# Altium PCB PMPi-PCB.PcbDoc
Units mil, origin at the board's own origin, x right, y up, seen from the top; angles counter-clockwise.
Board outline 1890.01 x 2124.02 mil, 2 copper layers (Top Layer, Bottom Layer), stack 61.811 mil thick; 12 components, 52 nets, 198 pads, 4 vias.
Unrouted connection lines stored in the file: 24.
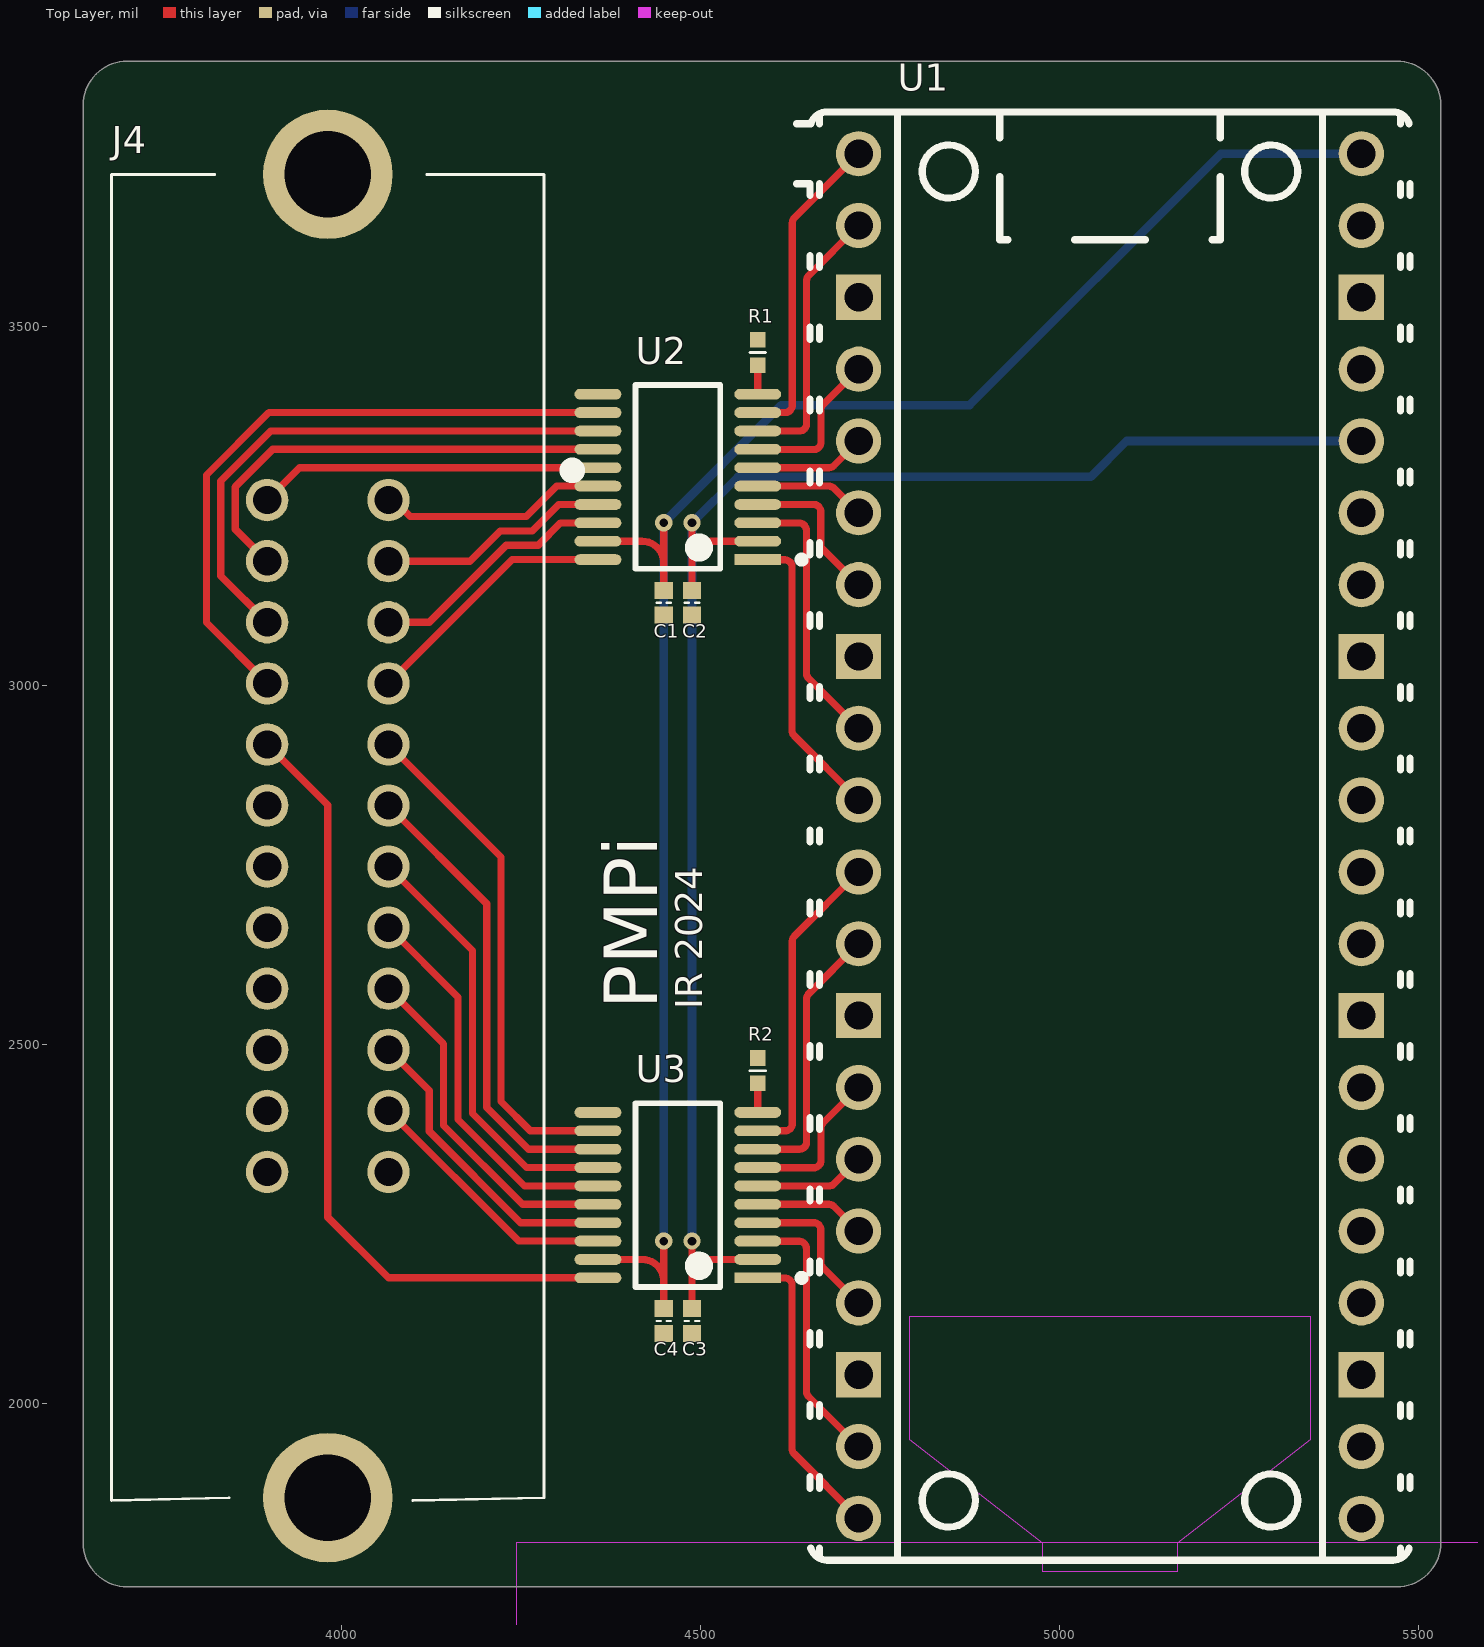
[diagram p0: Top Layer view]
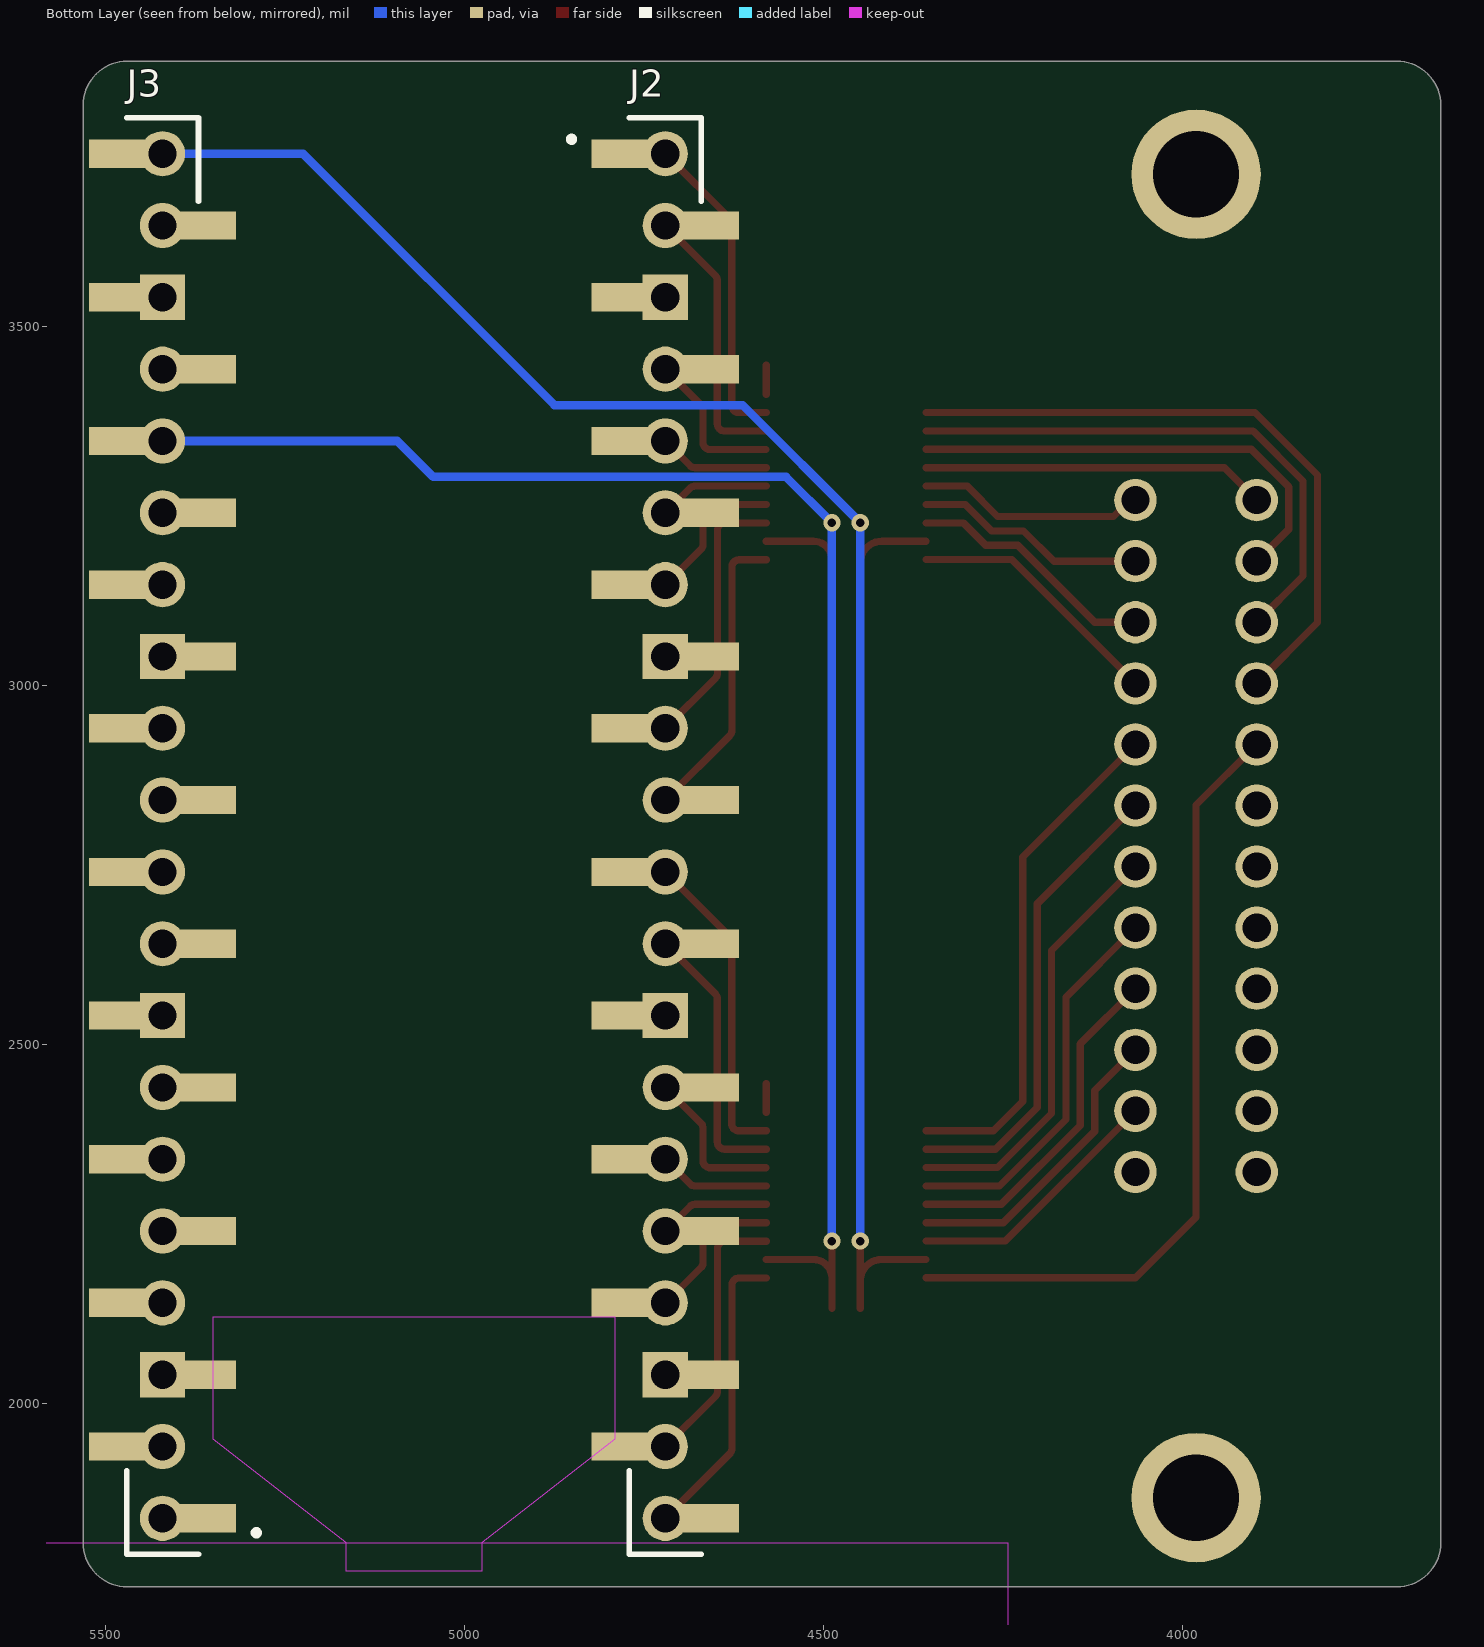
[diagram p1: Bottom Layer view, seen from below]

## Layer stack, top to bottom
Top Solder: solder mask 0.5, Solder Resist, Dk 3.8
Top Layer: signal copper 1.378
Dielectric: core 59.0551, FR-4, Dk 4.5
Bottom Layer: signal copper 1.378
Bottom Solder: solder mask 0.5, Solder Resist, Dk 3.8

## Board outline
3640.43,1805.75 3640.43,3807.72 cw(c3701.45,3807.72) 3701.45,3868.74 5469.41,3868.74 cw(c5469.41,3807.72) 5530.43,3807.72 5530.43,1805.75 cw(c5469.41,1805.75) 5469.41,1744.72 3701.45,1744.72 cw(c3701.45,1805.75)

## Design rules (kind name [scope] priority, off if disabled: settings)
BoardOutlineClearance [All] p1: gap=7.87 ignorepadtopadclearanceinfootprint=FALSE
Clearance [All] p1: gap=5 ignorepadtopadclearanceinfootprint=FALSE except(9.84: Arc-Hole Track-Hole SMDPad-Hole THPad-Hole Via-Hole Fill-Hole Poly-Hole Region-Hole Text-Hole)
ComponentClearance [All] p1: gap=5 collisioncheckmode=3 verticalgap=5 showdistances=TRUE
DiffPairsRouting [All] p1: maxlimit=10 minlimit=5 mostfreqgap=5 toplayer_minwidth=5 toplayer_maxwidth=1000 toplayer_prefwidth=5 bottomlayer_minwidth=5 bottomlayer_maxwidth=1000 bottomlayer_prefwidth=5 maxuncoupledlength=500
Height [All] p1: minheight=0 maxheight=71497.94 prefheight=500
HoleSize [All] p1: absolutevalues=TRUE maxlimit=248.03 minlimit=11.81 maxpercent=80.000 minpercent=20.000
HoleToHoleClearance [All] p1: gap=9.84 allowstackedmicrovias=FALSE
MinimumAnnularRing [All] p1: minimumring=5
MinimumSolderMaskSliver [All] p1: minsoldermaskwidth=0
PlaneClearance [All] p1: clearance=5
PlaneConnect PlaneConnectPowerPads [InPadClass('PowerPads')] p1: planeconnectstyle=Direct reliefexpansion=20 reliefentries=4 reliefconductorwidth=10 reliefairgap=10
PlaneConnect [All] p2: pad.planeconnectstyle=Relief pad.reliefexpansion=11.81 pad.reliefentries=4 pad.reliefconductorwidth=5 pad.reliefairgap=5 via.planeconnectstyle=Direct via.reliefexpansion=11.81 via.reliefentries=4 via.reliefconductorwidth=5 via.reliefairgap=5
PolygonConnect PolygonConnectPowerPads [All vs (InPadClass('PowerPads'))] p1: connectstyle=Direct reliefconductorwidth=10 reliefentries=4 polygonreliefangle="90 Angle" airgapwidth=10
PolygonConnect [All] p2: thpad.connectstyle=Relief thpad.reliefconductorwidth=5 thpad.reliefentries=4 thpad.polygonreliefangle="90 Angle" thpad.airgapwidth=5 smdpad.connectstyle=Relief smdpad.reliefconductorwidth=5 smdpad.reliefentries=4 smdpad.polygonreliefangle="90 Angle" smdpad.airgapwidth=5 via.connectstyle=Direct via.reliefconductorwidth=5 via.reliefentries=4 via.polygonreliefangle="90 Angle" via.airgapwidth=5
RoutingVias [All] p1: holewidth=16 width=32 viastyle="Through Hole" minholewidth=11.81 minwidth=23.62 maxholewidth=23.62 maxwidth=259.84
SilkToSilkClearance [All] p1: silktosilkclearance=0
SilkToSolderMaskClearance [IsPad] p1: minsilkscreentomaskgap=5 clearancetoexposedcopper=TRUE
SolderMaskExpansion [All] p1: expansion=2.95 istentingtop=FALSE
Width [All] p1: maxlimit=1000 minlimit=5 preferedwidth=16 minimp=50.000000 maximp=50.000000 favimp=50.000000
20 further rules are at their usual default settings.

## Classes and differential pairs
component class U_GPIB: C1 C2 C3 C4 J4 R1 R2 U2 U3
component class U_Pico: J2 J3 U1

## Components (designator, comment, footprint, x,y, rotation, side; value= is the part's Value field where it differs from the comment)
C1 "CAP-NP-2" "CAP 0402_1005" 4448.65,3114.8 r270 top value=100nF
C2 "CAP-NP-2" "CAP 0402_1005" 4488.02,3114.8 r270 top value=100nF
C3 "CAP-NP-2" "CAP 0402_1005" 4488.02,2114.8 r270 top value=100nF
C4 "CAP-NP-2" "CAP 0402_1005" 4448.65,2114.8 r270 top value=100nF
J2 "CMP-708-000000-5" SAMTEC_SSM-120-L-SV-BE 4720,2790 r90 bottom
J3 "CMP-708-000000-5" SAMTEC_SSM-120-L-SV-BE 5420,2790 r270 bottom
J4 "111-024-113L001" 111024113L001 4065.43,3257.72 r270 top locked
R1 "10K-0402-0.1/1" "RES 0402_1005" 4579.57,3463.23 r270 top value=10k
R2 "10K-0402-0.1/1" "RES 0402_1005" 4579.57,2463.23 r270 top value=10k
U1 "Raspberry Pi Pico WH" RASPBERRYPIPICOWH-Footprint-1 4659.1,1787.19 r0 top
U2 "TXS0108EQPWRQ1" FP-PW0020A-IPC_B 4468.33,3290 r180 top
U3 "TXS0108EQPWRQ1" FP-PW0020A-IPC_B 4468.33,2290 r180 top

## Footprints (in the part's own frame and the unit in brackets; to place one, negate y for a bottom-side part, rotate by r counter-clockwise, add the part's x,y. Pads: shape width x height; smd on the part's side, far side on the other; paste and mask are expansions set on the pad)
111024113L001 [mm]
  round 1.5 hole 1: 1(0,0) 2(2.16,0) 3(4.32,0) 4(6.48,0) 5(8.64,0) 6(10.8,0) 7(12.96,0) 8(15.12,0) 9(17.28,0) 10(19.44,0) 11(21.6,0) 12(23.76,0) 13(0,-4.29) 14(2.16,-4.29) 15(4.32,-4.29) 16(6.48,-4.29) 17(8.64,-4.29) 18(10.8,-4.29) 19(12.96,-4.29) 20(15.12,-4.29) 21(17.28,-4.29) 22(19.44,-4.29) 23(21.6,-4.29) 24(23.76,-4.29)
  round 4.575 hole 3.05: MH1(-11.52,-2.145) MH2(35.28,-2.145)
  silkscreen extent -11.52,-9.79 35.38,6.55, body extent -15.44,-9.79 39.21,5.51, height 13.88
"CAP 0402_1005" [mm] "Chip Capacitor, 2-Leads, Body 1.02x0.51mm, IPC Medium Density"
  rect 0.6x0.64 smd: 1(-0.44,0) 2(0.44,0)
  silkscreen extent 0,-0.26 0,0.26, body extent -0.5,-0.26 0.5,0.26, height 0.52
FP-PW0020A-IPC_B [mm]
  rect 1.655x0.381 smd paste+0 mask+0: 1(-2.825,2.925)
  rrect100% 1.655x0.381 smd paste+0 mask+0: 2(-2.825,2.275) 3(-2.825,1.625) 4(-2.825,0.975) 5(-2.825,0.325) 6(-2.825,-0.325) 7(-2.825,-0.975) 8(-2.825,-1.625) 9(-2.825,-2.275) 10(-2.825,-2.925) 11(2.825,-2.925) 12(2.825,-2.275) 13(2.825,-1.625) 14(2.825,-0.975) 15(2.825,-0.325) 16(2.825,0.325) 17(2.825,0.975) 18(2.825,1.625) 19(2.825,2.275) 20(2.825,2.925)
  silkscreen extent -4.5,-3.25 1.5,3.25, body extent -3.9,-3.5 3.9,3.5, height 0.25
RASPBERRYPIPICOWH-Footprint-1 [mm]
  round 1.6 hole 1: 1(1.547,49.601) 2(1.547,47.061) 4(1.547,41.981) 5(1.547,39.441) 6(1.547,36.901) 7(1.547,34.361) 9(1.547,29.281) 10(1.547,26.741) 11(1.547,24.201) 12(1.547,21.661) 14(1.547,16.581) 15(1.547,14.041) 16(1.547,11.501) 17(1.547,8.961) 19(1.547,3.881) 20(1.547,1.341) 21(19.327,1.341) 22(19.327,3.881) 24(19.327,8.961) 25(19.327,11.501) 26(19.327,14.041) 27(19.327,16.581) 29(19.327,21.661) 30(19.327,24.201) 31(19.327,26.741) 32(19.327,29.281) 34(19.327,34.361) 35(19.327,36.901) 36(19.327,39.441) 37(19.327,41.981) 39(19.327,47.061) 40(19.327,49.601)
  rect 1.6x1.6 hole 1: 3(1.547,44.521) 8(1.547,31.821) 13(1.547,19.121) 18(1.547,6.421) 23(19.327,6.421) 28(19.327,19.121) 33(19.327,31.821) 38(19.327,44.521)
  Keep-Out Layer region: -10.563,-9.529 31.437,-9.529 31.437,0.471 -10.563,0.471
  Keep-Out Layer region: 3.337,4.131 8.037,0.481 8.037,-0.529 12.837,-0.529 12.837,0.481 17.537,4.131 17.537,8.471 3.337,8.471
  silkscreen extent -0.65,-0.14 21.05,51.08, body extent 0,0 21,52.35, height 3.69
"RES 0402_1005" [mm] "Chip Resistor, 2-Leads, Body 1.0x0.5mm, IPC Medium Density"
  rect 0.55x0.55 smd: 1(-0.45,0) 2(0.45,0)
  silkscreen extent 0,-0.28 0,0.27, body extent -0.5,-0.25 0.5,0.25, height 0.35
SAMTEC_SSM-120-L-SV-BE [mm]
  round 1.6 hole 1 unplated: 01(24.13,0) 02(21.59,0) 03(19.05,0) 04(16.51,0) 05(13.97,0) 06(11.43,0) 07(8.89,0) 08(6.35,0) 09(3.81,0) 10(1.27,0) 11(-1.27,0) 12(-3.81,0) 13(-6.35,0) 14(-8.89,0) 15(-11.43,0) 16(-13.97,0) 17(-16.51,0) 18(-19.05,0) 19(-21.59,0) 20(-24.13,0)
  rect 1x2 smd: 01(24.13,1.603) 02(21.59,-1.603) 03(19.05,1.603) 04(16.51,-1.603) 05(13.97,1.603) 06(11.43,-1.603) 07(8.89,1.603) 08(6.35,-1.603) 09(3.81,1.603) 10(1.27,-1.603) 11(-1.27,1.603) 12(-3.81,-1.603) 13(-6.35,1.603) 14(-8.89,-1.603) 15(-11.43,1.603) 16(-13.97,-1.603) 17(-16.51,1.603) 18(-19.05,-1.603) 19(-21.59,1.603) 20(-24.13,-1.603)
  silkscreen extent -25.4,-1.27 25.4,3.41, body extent -25.4,-2.29 25.4,2.29, height 7.62

## Part data
C1 C2 C3 C4: library part CMP-00000-4, "Ceramic Capacitor, Multilayer, Ceramic, 10V, 10% +Tol, 10% -Tol, X7R, 15% TC, 0.1uF, Surface Mount, 0402", Capacitance=100nF, Capacitor Type=Ceramic, Case Code (Imperial)=0402, Case Code (Metric)=1005, Dielectric=X7R, Max Operating Temperature=125°C, Min Operating Temperature=-55°C, Package Quantity=1, Package Shape=Rectangular, Package Style=SMTMeter, Rated DC Voltage (URdc)=10V, Tolerance=10%, Case/Package=0402, China RoHS Status=Unaffected, Conflict Mineral="DRC Conflict Undeterminable", Construction=Flat, Contact Plating=Tin, Depth=0.5mm, Dielectric Material=Ceramic, ELV=Compliant, EU SVHC List Version="Jan 23, 2024", Global PFAS Assessment Status="Not Affected", Green=Compliant, Halogen Free=Compliant, Height=0.5mm, JESD-609 Code=e3, Lead Free=Compliant, Length=1mm, Mount="Surface Mount", Mounting Technology="Surface Mount", Multilayer=Yes, NAS411=Affected, Packaging="Tape and Reel", Persistent Organic Pollutants (POPs)="Not Affected", Pins=2, Radiation Hardening=No, Rare Earth Element Information="Rare Earth Free", Reach SVHC Compliant=Yes, REACH(SVHC) Information=Unaffected, RoHS Compliant=Yes, RoHS Status=Yes, RoHS Version="2011/65/EU, 2015/863", Series=CL, Temperature Characteristics Code=X7R, Terminal Finish=Nickel, Termination=Wraparound, Thickness=0.022inch, Tolerance  (fill in as +-)=10%, Tolerance (fill in as +-)=10%, TSCA=Compliant, Voltage Rating=10V, Width=0.5mm
J2 J3: library part CMP-002-00006-2, "Board Connector, 20 Contact(s), 1 Row(s), Female, Straight, Surface Mount Terminal, Socket", Manufacturer Series=SSM, Package=None, Availability=Unavailable, Body/Shell Style=SOCKET, China RoHS Status=Unaffected, Conflict Mineral="DRC Conflict Free", Connector Type="BOARD CONNECTOR", Contact Finish - Mating="GOLD (10) OVER NICKEL (50)", Contact Finish - Termination="MATTE TIN OVER NICKEL (50)", Contact Gender=Female, Contact Material=Bronze, Design Item ID=SSM-120-L-SV-BE, DIN Conformance=No, ELV=Compliant, EU SVHC List Version="Jan 23, 2024", Filter Feature=No, Global PFAS Assessment Status="Not Affected", Green=Compliant, Halogen Free=Compliant, IEC Conformance=No, JESD-609 Code=e3, Lead Free=Compliant, Mating Information="MULTIPLE MATING PARTS AVAILABLE", MF="{'manufacturer': u'Samtec'}", MIL Conformance=No, Mixed Contacts=No, Mounting Style=STRAIGHT, Mounting Technology=Board, MP=SSM-120-L-SV-BE, NAS411=Affected, Number of Contacts=20, Number of Rows Loaded=1, Option="General Purpose", Persistent Organic Pollutants (POPs)=Compliant, Price=None, Rare Earth Element Information="Rare Earth Free", Reach SVHC Compliant=Yes, REACH(SVHC) Information=Unaffected, RoHS Compliant=Yes, RoHS Status=Yes, RoHS Version="2011/65/EU, 2015/863", Source=SSM-120-L-SV-BE-K.SchLib, Terminal Pitch=2.54mm, Termination=SMD/SMT, TSCA=Compliant
J4: library part CMP-002-00009-2, "Telecom and Datacom Connector", Manufacturer_Name=NorComp, Mouser Part Number=636-111-024-113L001, Conflict Mineral="DRC Conflict Free", Datasheet Link=https://componentsearchengine.com/Datasheets/2/111-024-113L001.pdf, Design Item ID=111-024-113L001, ELV=Unknown, EU SVHC List Version="Jan 15, 2018", Global PFAS Assessment Status="Not Affected", Green=Unknown, Halogen Free=Unknown, Height=12.55mm, Lead Free=Unknown, Manufacturer_Part_Number=111-024-113L001, Mouser Price/Stock=https://www.mouser.co.uk/ProductDetail/NorComp/111-024-113L001?qs=IGgAdOvCTsTzuqCRtmjabw%3D%3D, Persistent Organic Pollutants (POPs)=Compliant, REACH(SVHC) Information=Unaffected, RoHS Status=Yes, RoHS Version=2011/65/EU, Source=SamacSys.SchLib, TSCA=Compliant
R1 R2: library part CMP-009-00033-2, "Fixed Resistor, Metal Glaze/thick Film, 0.1W, 10000ohm, 50V, 1% +/-Tol, 100ppm/Cel, Surface Mount, 0402", Case/Package=0402, Max Operating Temperature=155°C, Min Operating Temperature=-55°C, Package Height=0.35mm, Package Length=1mm, Package Shape=Rectangular, Package Style=SMTMeter, Package Width=0.5mm, Power=100mW, Rated Temperature=70°C, Resistor Type="FIXED RESISTOR", Temperature Coefficient=100ppm/°C, Tolerance=1%, Working Voltage=50V, China RoHS Status=Affected, Conflict Mineral="DRC Conflict Undeterminable", Construction=Rectangular, ELV="Not Compliant", EU SVHC List Version="Jan 23, 2024", Global PFAS Assessment Status="Not Affected", Green="Not Compliant", Halogen Free=Compliant, JESD-609 Code=e3, Lead Free="Not Compliant", Mounting Technology="Surface Mount", NAS411=Affected, Packaging="Tape and Reel", Persistent Organic Pollutants (POPs)=Compliant, Pins=2, Rare Earth Element Information="Rare Earth Free", Reach SVHC Compliant=Yes, REACH(SVHC) Information=Unaffected, Reference Standard=AEC-Q200, RoHS Compliant=Yes, RoHS Status="Yes with Exemption", RoHS Version="2011/65/EU, 2015/863", Technology="METAL GLAZE/THICK FILM", Terminal Finish=Nickel, Termination=Wraparound, TSCA=Compliant
U1: library part CMP-759-000000-2, "RASPBERRY PI BOARD, ARM CORTEX-M0+; Silicon Manufacturer: Raspberry Pi; No. of Bits: 32bit; Silicon Family Name: -;...", ComponentLink1Description=Source, ComponentLink1URL=https://github.com/recursivenomad/ki-lime-pi-pico, Design Item ID=CMP-00016-14, Source=Main.SCHLIB
U2 U3: library part CMP-015-00001-1, "Interface Circuit, PDSO20", Case/Package=TSSOP, Max Operating Temperature=125°C, Max Supply Voltage=3.6V, Min Operating Temperature=-40°C, Min Supply Voltage=1.4V, Nominal Supply Voltage=1.5V, Package Body Material=Plastic, Package Equivalence Code=TSSOP20,.25, Package Shape=Rectangular, Package Style="SMALL OUTLINE, THIN PROFILE, SHRINK PITCHMeter", Temperature Grade=AUTOMOTIVE, Channels=8, China RoHS Status=Unaffected, Conflict Mineral="DRC Conflict Free", ELV=Compliant, EU SVHC List Version="Jan 23, 2024", Global PFAS Assessment Status="Not Affected", Green=Compliant, Halogen Free=Compliant, Height - Seated (Max)=1.2mm, Interface IC Type="INTERFACE CIRCUIT", JESD-30 Code=R-PDSO-G20, JESD-609 Code=e4, Lead Free=Compliant, Length=6.5mm, Moisture Sensitivity Level=1, NAS411=Affected, Persistent Organic Pollutants (POPs)=Compliant, Pins=20, Rare Earth Element Information="Contain Rare Earth Element", Reach SVHC Compliant=Yes, REACH(SVHC) Information=Unaffected, RoHS Compliant=Yes, RoHS Status=Yes, RoHS Version="2011/65/EU, 2015/863", Surface Mount=Yes, Terminal Finish=Nickel, Terminal Form="Gull Wing", Terminal Pitch=0.65mm, Terminal Position=DUAL, TSCA=Compliant, Width=4.4mm

## Via types
v1: diameter 24, hole 12, Top Layer to Bottom Layer, 4 vias

## Nets (pads, with @x,y where several pads share a name; then routed paths per layer and width w, separated by ;. In a path a pad name is that pad's centre, name@x,y a point inside that pad or via, vN(x,y) a via of type N, cw(c..) or ccw(c..) an arc to the next point about the centre after c; other vN are vias at no path point)
+3V3: C2.1 C3.1 J3.16 U1.36 U2.2 U3.2 | length 2379.6
  Top Layer w10: C3.1 4488.02,2174.57 ; v1(4488.02,2226.02) 4488.02,2174.57 ; C2.1 4488.02,3174.57 ; v1(4488.02,3226.02) 4488.02,3174.57 ; U3.2 4513.88,2200.43 ccw(c4513.88,2174.57) 4488.02,2174.57 ; U2.2 4513.88,3200.43 ccw(c4513.88,3174.57) 4488.02,3174.57
  Bottom Layer w12: v1(4488.02,2226.02) v1(4488.02,3226.02) 4552,3290 5043.08,3290 5093.08,3340 U1.36
+5: C1.1 C4.1 J3.20 U1.40 U2.19 U3.19 | length 2589.9
  Top Layer w10: U3.19 4418.36,2200.43 cw(c4418.36,2170.14) 4448.65,2170.14 ; U2.19 4418.36,3200.43 cw(c4418.36,3170.14) 4448.65,3170.14 ; C4.1 4448.65,2170.14 ; v1(4448.65,2226.02) 4448.65,2170.14 ; C1.1 4448.65,3170.14 ; v1(4448.65,3226.02) 4448.65,3170.14
  Bottom Layer w12: v1(4448.65,2226.02) v1(4448.65,3226.02) 4448.65,3226.25 4612.4,3390 4874.4,3390 5224.4,3740 U1.40
ADC0: J3.11 U1.31
ADC1: J3.12 U1.32
ADC2: J3.14 U1.34
ATN: J4.11 U3.18 | length 366.8
  Top Layer w10: J4.11 4246.72,2226.02 U3.18
DAV: J4.6 U3.13 | length 656.1
  Top Layer w10: J4.6 4202.2,2695.74 4202.2,2411.96 4260.19,2353.98 U3.13
DIO1: J4.1 U2.16 | length 318.7
  Top Layer w10: J4.1 4072.94,3257.72 4095.81,3234.84 4257.3,3234.84 4299.67,3277.2 U2.16
DIO2: J4.2 U2.17 | length 324.4
  Top Layer w10: J4.2 4178.94,3172.68 4221.1,3214.84 4265.59,3214.84 4302.36,3251.61 U2.17
DIO3: J4.3 U2.18 | length 349
  Top Layer w10: J4.3 4122.18,3087.64 4229.38,3194.84 4273.87,3194.84 4305.05,3226.02 U2.18
DIO4: J4.4 U2.20 | length 363
  Top Layer w10: J4.4 4237.67,3174.84 U2.20
DIO5: J4.13 U2.15 | length 479.2
  Top Layer w10: J4.13 3941.61,3302.8 U2.15
DIO6: J4.14 U2.14 | length 648.7
  Top Layer w10: J4.14 3852,3217.2 3852,3276.16 3904.23,3328.39 U2.14
DIO7: J4.15 U2.13 | length 777.4
  Top Layer w10: J4.15 3832,3152.17 3832,3284.44 3901.53,3353.98 U2.13
DIO8: J4.16 U2.12 | length 906.2
  Top Layer w10: J4.16 3812,3087.13 3812,3292.73 3898.84,3379.57 U2.12
EOI: J4.5 U3.12 | length 714
  Top Layer w10: J4.5 4222.2,2760.78 4222.2,2420.25 4262.89,2379.57 U3.12
GND: C1.2 C2.2 C3.2 C4.2 J2.03 J2.08 J2.13 J2.18 J3.03 J3.08 J3.13 J3.18 J4.18 J4.19 J4.20 J4.21 J4.22 J4.23 J4.24 R1.1 R2.1 U1.3 U1.8 U1.13 U1.18 U1.23 U1.28 U1.33 U1.38 U2.11 U3.11
I2C0_SCL: J3.06 U1.26
I2C0_SDA: J3.07 U1.27
I2C1_SCL: J3.05 U1.25
I2C1_SDA: J3.04 U1.24
iATN: J2.19 U1.19 U3.3 | length 378.9
  Top Layer w10: U3.3@4579.57,2225.74 4637.34,2225.74 cw(c4637.34,2215.74) 4647.34,2215.74 4647.34,2016.81 ccw(c4657.34,2016.81) 4650.25,2009.75 U1.19
iDAV: J2.12 U1.12 U3.8 | length 379.3
  Top Layer w10: U3.8 4637.62,2353.98 ccw(c4637.62,2363.98) 4647.62,2363.98 4647.62,2563.47 cw(c4657.62,2563.47) 4650.53,2570.53 U1.12
iDIO1: J2.06 U1.6 U2.5 | length 155.4
  Top Layer w10: U2.5 4678.65,3277.2 cw(c4678.65,3267.2) 4685.7,3274.3 U1.6
iDIO2: J2.07 U1.7 U2.4 | length 216.6
  Top Layer w10: U2.4 4657.34,3251.61 cw(c4657.34,3241.61) 4667.34,3241.61 4667.34,3196.24 ccw(c4677.34,3196.24) 4670.25,3189.19 J2.07@4719.72,3139.72
iDIO3: J2.09 U1.9 U2.3 | length 378.9
  Top Layer w10: U2.3@4579.57,3225.74 4637.34,3225.74 cw(c4637.34,3215.74) 4647.34,3215.74 4647.34,3016.81 ccw(c4657.34,3016.81) 4650.25,3009.75 U1.9
iDIO4: J2.10 U1.10 U2.1 | length 416
  Top Layer w10: U2.1@4579.57,3174.56 4617.34,3174.56 cw(c4617.34,3164.56) 4627.34,3164.56 4627.34,2936.81 ccw(c4637.34,2936.81) 4630.25,2929.75 U1.10
iDIO5: J2.05 U1.5 U2.6 | length 155.4
  Top Layer w10: U2.6 4678.65,3302.8 ccw(c4678.65,3312.8) 4685.7,3305.7 U1.5
iDIO6: J2.04 U1.4 U2.7 | length 216.6
  Top Layer w10: U2.7@4579.85,3328.11 4657.62,3328.11 ccw(c4657.62,3338.11) 4667.62,3338.11 4667.62,3383.48 cw(c4677.62,3383.47) 4670.53,3390.53 U1.4
iDIO7: J2.02 U1.2 U2.8 | length 379.3
  Top Layer w10: U2.8 4637.62,3353.98 ccw(c4637.62,3363.98) 4647.62,3363.98 4647.62,3563.47 cw(c4657.62,3563.47) 4650.53,3570.53 U1.2
iDIO8: J2.01 U1.1 U2.9 | length 442
  Top Layer w10: U2.9 4617.62,3379.57 ccw(c4617.62,3389.57) 4627.62,3389.57 4627.62,3643.47 cw(c4637.62,3643.47) 4630.53,3650.53 U1.1
iEOI: J2.11 U1.11 U3.9 | length 442
  Top Layer w10: U3.9 4617.62,2379.57 ccw(c4617.62,2389.57) 4627.62,2389.57 4627.62,2643.47 cw(c4637.62,2643.47) 4630.53,2650.53 U1.11
IFC: J4.9 U3.16 | length 482.5
  Top Layer w10: J4.9 4142.2,2500.62 4142.2,2387.11 4252.11,2277.2 U3.16
iIFC: J2.16 U1.16 U3.5 | length 155.4
  Top Layer w10: U3.5 4678.65,2277.2 cw(c4678.65,2267.2) 4685.7,2274.3 U1.16
iNDAC: J2.15 U1.15 U3.6 | length 155.4
  Top Layer w10: U3.6 4678.65,2302.8 ccw(c4678.65,2312.8) 4685.7,2305.7 U1.15
iNRFD: J2.14 U1.14 U3.7 | length 216.6
  Top Layer w10: U3.7@4579.85,2328.11 4657.62,2328.11 ccw(c4657.62,2338.11) 4667.62,2338.11 4667.62,2383.48 cw(c4677.62,2383.47) 4670.53,2390.53 U1.14
iREN: J2.20 U1.20 U3.1 | length 416
  Top Layer w10: U3.1@4579.57,2174.56 4617.34,2174.56 cw(c4617.34,2164.56) 4627.34,2164.56 4627.34,1936.81 ccw(c4637.34,1936.81) 4630.25,1929.75 U1.20
iSRQ: J2.17 U1.17 U3.4 | length 216.6
  Top Layer w10: U3.4 4657.34,2251.61 cw(c4657.34,2241.61) 4667.34,2241.61 4667.34,2196.24 ccw(c4677.34,2196.24) 4670.25,2189.19 J2.17@4719.72,2139.72
NDAC: J4.8 U3.15 | length 540.4
  Top Layer w10: J4.8 4162.2,2565.66 4162.2,2395.4 4254.81,2302.8 U3.15
NetJ3_09: J3.09 U1.29
NetJ3_10: J3.10 U1.30
NetJ3_15: J3.15 U1.35
NetJ3_17: J3.17 U1.37
NetJ3_19: J3.19 U1.39
NetJ4_12: J4.12 J4.MH1 J4.MH2
NetR1_2: R1.2 U2.10 | length 40.4
  Top Layer w10: U2.10 R1.2
NetR2_2: R2.2 U3.10 | length 40.4
  Top Layer w10: U3.10 R2.2
NRFD: J4.7 U3.14 | length 598.2
  Top Layer w10: J4.7 4182.2,2630.7 4182.2,2403.68 4257.4,2328.49 U3.14@4357.1,2328.49
REN: J4.17 U3.20 | length 1104.4
  Top Layer w10: J4.17 3980.98,2833.11 3980.98,2259.29 4065.43,2174.84 U3.20
SRQ: J4.10 U3.17 | length 424.6
  Top Layer w10: J4.10 4122.2,2435.58 4122.2,2378.83 4249.42,2251.61 U3.17
UART_RX: J3.02 U1.22
UART_TX: J3.01 U1.21

## Silkscreen, mask and mechanical layers (free items; w line width, h text height)
Top Overlay:
  text "PMPi" at 4463.84,2548.5 h128 r90
  text "IR 2024" at 4514.73,2548.5 h64 r90
Mechanical 7:
  the board outline again, w5

## Text inside footprints (layer, text, board x,y; h text height)
U1: Mechanical 7 "Antenna / Keep Out" at 4790.47,1781.73 h48; Mechanical 7 "2.4 GHz RF / Keep unobstructed by metal as far as possible in all dimensions" at 4243.23,1412.05 h48